# EAGLE board Rechargeable battery capacity tester (EAGLE 6.3)
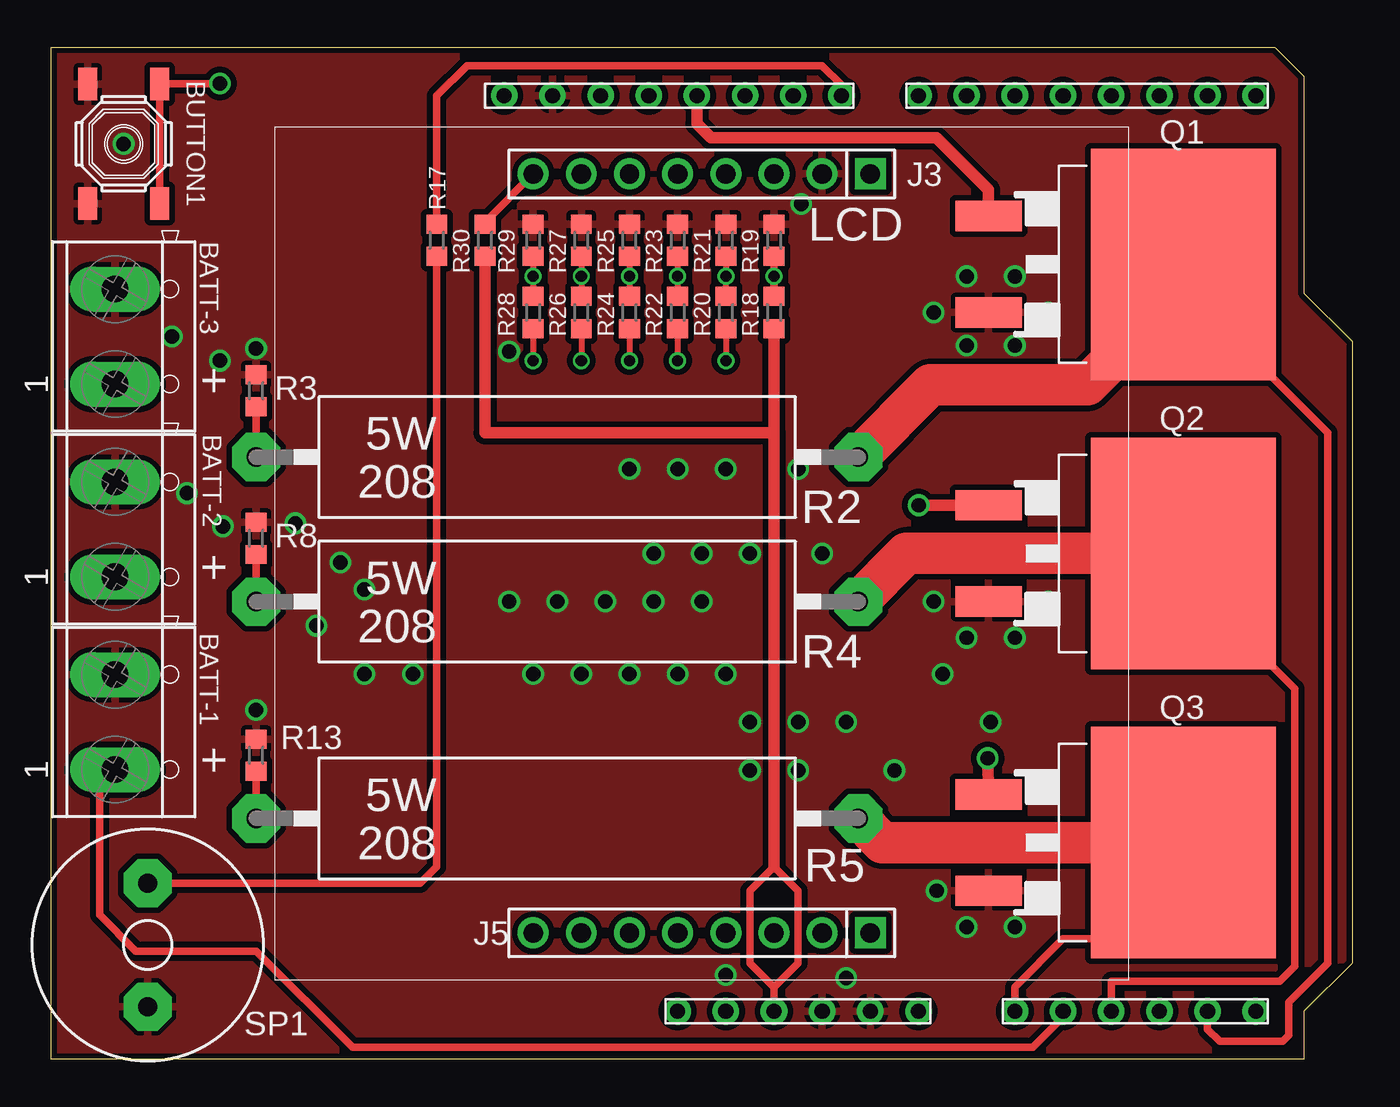
[diagram p0: board, top side]
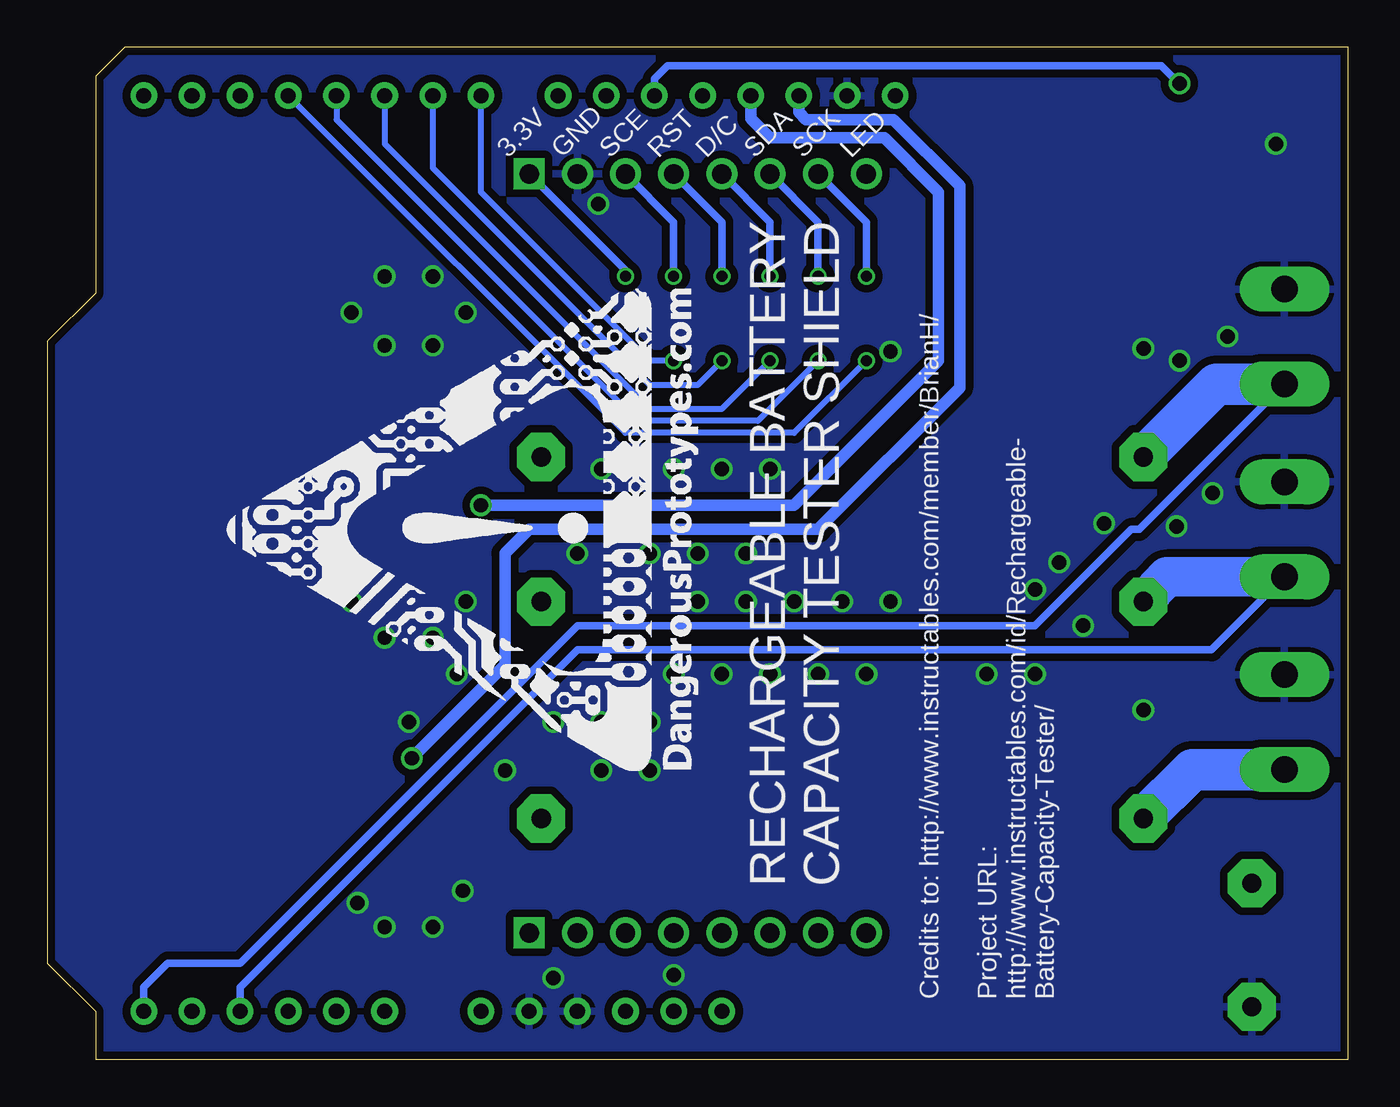
[diagram p1: board, bottom side, seen from below]

Size 68.58 x 53.34 mm. Coordinates in mm from the lower left corner, seen from the top.
Outline: 0,0 0,53.34 64.52,53.34 66.04,51.82 66.04,40.39 68.58,37.85 68.58,5.08 66.04,2.54 66.04,0 0,0
Copper layers (1*16): Top 0.035mm / dielectric 1.5mm / Bottom 0.035mm
Design rules "dirt_cheap_dirty_boards.v1": minimum track width 5mil, minimum drill 12mil, track to track 5mil, track to pad 5mil, pad to pad 5mil, via to via 5mil, smd to smd 0mil, copper to edge 10mil, drill to drill 10mil, minimum pad ring 10mil, minimum via ring 6mil, stop-mask expansion 2mil, vias tented up to drill 25mil, thermal gap 10mil

## Footprints (pad centres in the part's own frame; a part is rotated, then mirrored left to right if it is on the bottom)
CON_ARDUINO = drill 0.8 pad 1.4: 3V3 25.4,-12.7; 5V 25.4,-10.16; A_0 25.4,2.54; A_1 25.4,5.08; A_2 25.4,7.62; A_3 25.4,10.16; A_4 25.4,12.7; A_5 25.4,15.24; AREF -22.86,-24.384; D_0 -22.86,15.24; D_1 -22.86,12.7; D_2 -22.86,10.16; D_3 -22.86,7.62; D_4 -22.86,5.08; D_5 -22.86,2.54; D_6 -22.86,0; D_7 -22.86,-2.54; D_8 -22.86,-6.604; D_9 -22.86,-9.144; D_10 -22.86,-11.684; D_11 -22.86,-14.224; D_12 -22.86,-16.764; D_13 -22.86,-19.304; GND0 -22.86,-21.844; GND1 25.4,-7.62; GND2 25.4,-5.08; RESET 25.4,-15.24; VIN 25.4,-2.54
TERMINAL_BLOCK_2P_5 = drill 1.4 pad 2.38 long: 1 2.5,-0.45; 2 -2.5,-0.45
SW_TACT_SMALL = smd 1.7 x 1: 1 -3.15,1.9; 2 3.15,1.9; 3 -3.15,-1.9; 4 3.15,-1.9
M1X8 = drill 1.02 pad 1.632 square: 1 -8.89,0 | drill 1.02 pad 1.632: 2 -6.35,0; 3 -3.81,0; 4 -1.27,0; 5 1.27,0; 6 3.81,0; 7 6.35,0; 8 8.89,0
D2PAK = smd 1.6 x 3.5: 1 -2.54,-10.28; 3 2.54,-10.28 | smd 12.2 x 9.75: 2 0,0
KH208-8 = drill 1.016 pad 2.54 octagon: 1 -15.875,0; 2 15.875,0
R603 = smd 1 x 1.1: 1 -0.85,0; 2 0.85,0
AL60P = drill 1.016 pad 2.54 octagon: 1 -3.251,0; 2 3.251,0

## Placement (x,y rotation side)
ARDUINO1  CON_ARDUINO  [CON_ARDUINO]  48.26,27.94 270 top
BATT-1  CON_TERMINAL_BLOCK_02-5MM  [TERMINAL_BLOCK_2P_5]  3.81,17.78 270 top
BATT-2  CON_TERMINAL_BLOCK_02-5MM  [TERMINAL_BLOCK_2P_5]  3.81,27.94 270 top
BATT-3  CON_TERMINAL_BLOCK_02-5MM  [TERMINAL_BLOCK_2P_5]  3.81,38.1 270 top
BUTTON1  [SW_TACT_SMALL]  3.81,48.26 90 top
J3  CON_HEADER_1X08-PTH  [M1X8]  34.29,46.67 180 top
J5  CON_HEADER_1X08-PTH  [M1X8]  34.29,6.67 180 top
Q1  IRL3103S  [D2PAK]  59.69,41.91 270 top
Q2  IRL3103S  [D2PAK]  59.69,26.67 270 top
Q3  IRL3103S  [D2PAK]  59.69,11.43 270 top
R2  2.5R 9W  [KH208-8]  26.67,31.75 180 top
R3  2M  [R603]  10.79,35.24 270 top
R4  2.5R 9W  [KH208-8]  26.67,24.13 180 top
R5  2.5R 9W  [KH208-8]  26.67,12.7 180 top
R8  2M  [R603]  10.79,27.46 270 top
R13  2M  [R603]  10.79,16.03 270 top
R17  180R  [R603]  20.32,43.18 90 top
R18  1.8K  [R603]  38.1,39.37 90 top
R19  3.3K  [R603]  38.1,43.18 270 top
R20  1.8K  [R603]  35.56,39.37 90 top
R21  3.3K  [R603]  35.56,43.18 270 top
R22  1.8K  [R603]  33.02,39.37 90 top
R23  3.3K  [R603]  33.02,43.18 270 top
R24  1.8K  [R603]  30.48,39.37 90 top
R25  3.3K  [R603]  30.48,43.18 270 top
R26  1.8K  [R603]  27.94,39.37 90 top
R27  3.3K  [R603]  27.94,43.18 270 top
R28  1.8K  [R603]  25.4,39.37 90 top
R29  3.3K  [R603]  25.4,43.18 270 top
R30  30R  [R603]  22.86,43.18 90 top
SP1  AL60P  [AL60P]  5.08,6.03 270 top
U$1  FRAME_DINA4_L  [DP_LOGO]  0,-8.89 0 top  (outside the outline)
U$2  [DP_LOGO_ART_1X1]  34.29,15.24 90 bottom

## Library data of the parts
ARDUINO1 BATT-1-BATT-3 BUTTON1 J3 J5 R3 R8 R13 R17-R30 U$2 = dp_devices
Q1-Q3 = dp_devices.v6
R2 R4 R5 = resistor-power; OC_FARNELL: unknown; OC_NEWARK: unknown
SP1 = buzzer; OC_FARNELL: unknown; OC_NEWARK: unknown
U$1 = dp_devices; FF1: Credits to: http://www.instructables.com/member/BrianH/; LICENSE: CC-BY-SA; PROJECT: Rechargeable Battery Capacity Tester; URL1: http://dangerousprototypes.com; URL2: http://www.instructables.com/id/Rechargeable-Battery-Capacity-Tester/

## Nets
!RESET: ARDUINO1.RESET
+5V: ARDUINO1.5V R18.1 R30.1
AD0: ARDUINO1.A_0 Q3.2 R5.1
AD1: ARDUINO1.A_1 BATT-1.1 R5.2 R13.2
AD2: ARDUINO1.A_2 Q2.2 R4.1
AD3: ARDUINO1.A_3 BATT-2.1 R4.2 R8.2
AD4: ARDUINO1.A_4 Q1.2 R2.1
AD5: ARDUINO1.A_5 BATT-3.1 R2.2 R3.2
D3: ARDUINO1.D_3 R28.1
D4: ARDUINO1.D_4 R26.1
D5: ARDUINO1.D_5 R24.1
D6: ARDUINO1.D_6 R22.1
D7: ARDUINO1.D_7 R20.1
D8: ARDUINO1.D_8 R17.2
D10: ARDUINO1.D_10 BUTTON1.3 BUTTON1.4
D11/MOSI: ARDUINO1.D_11 Q1.1
D12/MISO: ARDUINO1.D_12 Q2.1
D13/SCK: ARDUINO1.D_13 Q3.1
GND: ARDUINO1.GND0 ARDUINO1.GND1 ARDUINO1.GND2 BATT-1.2 BATT-2.2 BATT-3.2 BUTTON1.1 BUTTON1.2 J3.2 Q1.3 Q2.3 Q3.3 R3.1 R8.1 R13.1 R19.1 R21.1 R23.1 R25.1 R27.1 R29.1 SP1.2
LCD_DC: J3.5 R24.2 R25.2
LCD_RST: J3.4 R22.2 R23.2
LCD_SCE: J3.3 R20.2 R21.2
LCD_SCK: J3.7 R28.2 R29.2
LCD_SDA: J3.6 R26.2 R27.2
LCD_VCC: J3.1 R18.2 R19.2
N$4: J3.8 R30.2
N$7: R17.1 SP1.1
VIN: ARDUINO1.VIN

## Tracks (layer width: path | path; a pad name or v marks a point on that pad's centre or on a via)
+5V
  Top 0.406: ARDUINO1.5V 38.1,3.81 | 38.1,3.81 36.83,5.08 36.83,8.89 38.1,10.16 39.37,8.89 39.37,5.08 38.1,3.81
  Top 0.61: R30.1 22.86,33.02 38.1,33.02 | 38.1,33.02 R18.1 | 38.1,33.02 38.1,10.16
AD0
  Top 0.406: ARDUINO1.A_0 50.8,3.81 53.34,6.35 55.88,6.35 55.88,11.43
  Top 2.184: Q3.2 55.88,11.43 43.81,11.43 R5.1
AD1
  Top 0.406: ARDUINO1.A_1 53.34,2.22 51.75,0.64 15.88,0.64 10.79,5.71 4.45,5.71 2.54,7.62 2.54,14.46 BATT-1.1 | R13.2 R5.2
  Bottom 2.184: BATT-1.1 8.21,15.28 R5.2
AD2
  Top 0.406: ARDUINO1.A_2 55.88,4.13 64.77,4.13 65.56,4.92 65.56,19.53 63.5,21.59 63.5,22.86 Q2.2
  Top 2.184: Q2.2 45.09,26.67 R4.1
AD3
  Top 0.406: R8.2 R4.2
  Bottom 0.406: ARDUINO1.A_3 58.42,3.81 40.64,21.59 7.21,21.59 BATT-2.1
  Bottom 2.083: BATT-2.1 9.56,25.44 R4.2
AD4
  Top 0.406: ARDUINO1.A_4 60.96,1.59 61.59,0.95 64.93,0.95 65.25,1.27 65.25,3.02 67.31,5.08 67.31,33.02 63.5,36.83 63.5,38.1 Q1.2
  Top 2.184: Q1.2 58.42,41.91 57.15,40.64 57.15,38.1 54.61,35.56 46.35,35.56 R2.1
AD5
  Top 0.406: R3.2 R2.2
  Bottom 0.406: ARDUINO1.A_5 63.5,3.81 62.23,5.08 58.42,5.08 40.64,22.86 16.51,22.86 11.43,27.94 11.02,27.94 BATT-3.1
  Bottom 2.184: BATT-3.1 6.95,35.6 R2.2
D3  (via drill 0.58)
  Top 0.305: R28.1 v25.4,36.83
  Bottom 0.305: v25.4,36.83 29.21,33.02 38.1,33.02 ARDUINO1.D_3
D4  (via drill 0.58)
  Top 0.305: R26.1 v27.94,36.83
  Bottom 0.305: v27.94,36.83 31.11,33.66 37.47,33.66 53.34,49.53 ARDUINO1.D_4
D5  (via drill 0.58)
  Top 0.305: R24.1 v30.48,36.83
  Bottom 0.305: ARDUINO1.D_5 50.8,48.26 36.83,34.29 33.02,34.29 v30.48,36.83
D6  (via drill 0.58)
  Top 0.305: R22.1 v33.02,36.83
  Bottom 0.305: ARDUINO1.D_6 48.26,46.99 36.83,35.56 34.29,35.56 v33.02,36.83
D7  (via drill 0.58)
  Top 0.305: R20.1 v35.56,36.83
  Bottom 0.305: ARDUINO1.D_7 45.72,45.72 36.83,36.83 v35.56,36.83
D8
  Top 0.406: ARDUINO1.D_8 41.66,51.37 40.64,52.39 21.91,52.39 20.32,50.8 R17.2
D10  (via drill 0.76 pad 0.3)
  Top 0.406: BUTTON1.3 BUTTON1.4 5.74,51.44 v8.89,51.44
  Bottom 0.406: ARDUINO1.D_10 36.58,51.69 35.88,52.39 9.84,52.39 v8.89,51.44
D11/MOSI
  Top 0.61: ARDUINO1.D_11 34.04,49.31 34.77,48.58 46.67,48.58 49.41,45.84 Q1.1
D12/MISO  (via drill 0.76)
  Top 0.61: v45.72,29.21 Q2.1
  Bottom 0.61: ARDUINO1.D_12 31.5,49.59 30.48,48.58 24.45,48.58 21.59,45.72 21.59,36.83 29.21,29.21 v45.72,29.21
D13/SCK  (via drill 0.76)
  Top 0.61: v49.37,15.88 Q3.1
  Bottom 0.61: ARDUINO1.D_13 28.96,49.91 28.57,49.53 23.97,49.53 20.48,46.04 20.48,35.4 27.94,27.94 43.18,27.94 44.45,26.67 44.45,20.8 v49.37,15.88
GND  (via drill 0.76 pad 0.3)
  other vias: 44.45,15.24 52.55,39.37 48.26,22.23 46.51,24.13 50.8,22.23 48.26,41.27 46.51,39.37 26.67,24.13 52.23,8.26 7.14,29.84 8.89,36.83 12.86,28.26 10.79,37.47 10.79,18.41 6.35,38.1 19.05,20.32 30.48,20.32 50.8,6.99 52.55,24.13 46.67,8.89 48.26,6.99 49.53,17.78 41.91,17.78 16.51,20.32 25.4,20.32 30.48,31.11 39.53,45.09 9.05,28.1 35.56,4.45 41.91,4.29 24.13,37.31 3.81,48.26 29.21,24.13 27.94,20.32 48.26,37.62 50.8,37.62 50.8,41.27 24.13,24.13 15.24,26.19 13.97,22.86 16.51,24.77 31.75,26.67 46.99,20.32 34.29,26.67 33.02,31.11 36.83,17.78 36.83,15.24 33.02,20.32 31.75,24.13 34.29,24.13 35.56,20.32 35.56,31.11 36.83,26.67 40.64,26.67 39.37,31.11 39.37,17.78 39.37,15.24
  pour Top (isolate 0.305): 0,53.34 64.77,53.34 66.04,52.07 66.04,40.64 68.58,38.1 68.58,5.08 66.04,2.54 66.04,0 0,0
  pour Bottom (isolate 0.406): 0,53.34 64.77,53.34 66.04,52.07 66.04,40.64 68.58,38.1 68.58,5.08 66.04,2.54 66.04,0 0,0
LCD_DC  (via drill 0.58)
  Top 0.305: R25.2 v30.48,41.27 R24.2
  Bottom 0.406: v30.48,41.27 30.48,44.13 J3.5
LCD_RST  (via drill 0.58)
  Top 0.305: R23.2 v33.02,41.27 R22.2
  Bottom 0.406: v33.02,41.27 33.02,44.13 J3.4
LCD_SCE  (via drill 0.58)
  Top 0.305: R21.2 v35.56,41.27 R20.2
  Bottom 0.406: v35.56,41.27 35.56,44.13 J3.3
LCD_SCK  (via drill 0.58)
  Top 0.305: R29.2 v25.4,41.27 R28.2
  Bottom 0.406: v25.4,41.27 25.4,44.13 J3.7
LCD_SDA  (via drill 0.58)
  Top 0.305: R27.2 v27.94,41.27 R26.2
  Bottom 0.406: v27.94,41.27 27.94,44.13 J3.6
LCD_VCC  (via drill 0.58)
  Top 0.406: v38.1,41.27 R18.2 38.26,40.38 | R19.2 v38.1,41.27 | v38.1,41.27 38.1,41.59
  Bottom 0.406: v38.1,41.27 38.1,41.59 J3.1
N$4
  Top 0.406: R30.2 22.86,44.13 J3.8
N$7
  Top 0.406: SP1.1 19.44,9.28 20.32,10.16 R17.1

## Text on the board
tPlace: LCD | + | + | +
bPlace: LED | SCK | SDA | D/C | RST | SCE | GND | 3.3V | RECHARGEABLE BATTERY / CAPACITY TESTER SHIELD | Credits to: http://www.instructables.com/member/BrianH/ / / Project URL: / http://www.instructables.com/id/Rechargeable- / Battery-Capacity-Tester/